# EAGLE board keyboard (EAGLE 7.3.0)

Size 260 x 110 mm. Coordinates in mm from the lower left corner, seen from the top.
Outline: 0,0 260,0 260,110 0,110 0,0
Copper layers (1*16): Top 0.035mm / dielectric 1.5mm / Bottom 0.035mm
Design rules "default": minimum track width 10mil, minimum drill 24mil, track to track 8mil, track to pad 8mil, pad to pad 8mil, via to via 8mil, smd to smd 8mil, copper to edge 40mil, drill to drill 8mil, minimum pad ring 10mil, minimum via ring 8mil, stop-mask expansion 4mil, vias tented up to drill 0mil, thermal gap 10mil
Holes 0.61 mm at 38.66,27.23 133.27,17.38 219.95,27.54 205.66,63.74 129.46,64.06 53.58,63.42 5.95,103.42 86.92,103.11 162.8,103.42 238.36,103.42
Holes 0.51 mm at 4.68,55.16
Holes 0.38 mm at 253.92,63.74
Milling: 4 lines

## Footprints (pad centres in the part's own frame; a part is rotated, then mirrored left to right if it is on the bottom)
TACTILE-SWITCH-SMD = smd 1.524 x 0.762: 1 -2.794,1.905; 2 2.794,1.905; 3 -2.794,-1.905; 4 2.794,-1.905
SOD323-R = smd 0.6 x 0.6: A 1.1,0; C -1.1,0
SO14 = smd 0.66 x 2.032: 1 -3.81,-3.073; 2 -2.54,-3.073; 3 -1.27,-3.073; 4 0,-3.073; 5 1.27,-3.073; 6 2.54,-3.073; 7 3.81,-3.073; 8 3.81,3.073; 9 2.54,3.073; 10 1.27,3.073; 11 0,3.073; 12 -1.27,3.073; 13 -2.54,3.073; 14 -3.81,3.073
SO20W = smd 0.66 x 2.032: 1 -5.715,-5.029; 2 -4.445,-5.029; 3 -3.175,-5.029; 4 -1.905,-5.029; 5 -0.635,-5.029; 6 0.635,-5.029; 7 1.905,-5.029; 8 3.175,-5.029; 9 4.445,-5.029; 10 5.715,-5.029; 11 5.715,5.029; 12 4.445,5.029; 13 3.175,5.029; 14 1.905,5.029; 15 0.635,5.029; 16 -0.635,5.029; 17 -1.905,5.029; 18 -3.175,5.029; 19 -4.445,5.029; 20 -5.715,5.029
1X05 = drill 1.016 long: 1 -5.08,0; 2 -2.54,0; 3 0,0; 4 2.54,0; 5 5.08,0
1X08 = drill 1.016 long: 1 -8.89,0; 2 -6.35,0; 3 -3.81,0; 4 -1.27,0; 5 1.27,0; 6 3.81,0; 7 6.35,0; 8 8.89,0
1X02 = drill 1.016 long: 1 -1.27,0; 2 1.27,0
M0805 = smd 1.3 x 1.6: 1 -0.95,0; 2 0.95,0

## Placement (x,y rotation side)
0  [TACTILE-SWITCH-SMD]  39.61,92.95 0 bottom
1  [TACTILE-SWITCH-SMD]  209.47,92.63 0 bottom
2  [TACTILE-SWITCH-SMD]  190.42,92.63 0 bottom
3  [TACTILE-SWITCH-SMD]  172,92.95 0 bottom
4  [TACTILE-SWITCH-SMD]  152.32,92.63 0 bottom
5  [TACTILE-SWITCH-SMD]  133.91,93.58 0 bottom
6  [TACTILE-SWITCH-SMD]  115.81,92.95 0 bottom
7  [TACTILE-SWITCH-SMD]  96.12,92.63 0 bottom
8  [TACTILE-SWITCH-SMD]  77.39,92.95 0 bottom
9  [TACTILE-SWITCH-SMD]  58.34,92.95 0 bottom
A  [TACTILE-SWITCH-SMD]  195.18,54.85 0 bottom
B  [TACTILE-SWITCH-SMD]  110.41,36.43 0 bottom
BREAK  [TACTILE-SWITCH-SMD]  16.11,92.95 0 bottom
C  [TACTILE-SWITCH-SMD]  147.88,36.43 0 bottom
CAPS  [TACTILE-SWITCH-SMD]  23.41,35.8 0 bottom
CAPS1  [TACTILE-SWITCH-SMD]  236.46,36.11 0 bottom
CAPSLOCK  [TACTILE-SWITCH-SMD]  204.39,35.48 0 bottom
COMMA  [TACTILE-SWITCH-SMD]  29.77,16.11 0 bottom
D  [TACTILE-SWITCH-SMD]  157.08,55.48 0 bottom
D1  [SOD323-R]  68.82,84.38 0 top
D2  [SOD323-R]  74.22,84.69 0 top
D3  [SOD323-R]  79.3,84.69 0 top
D4  [SOD323-R]  84.69,84.69 0 top
D5  [SOD323-R]  90.72,84.69 0 top
D6  [SOD323-R]  97.08,84.69 0 top
D7  [SOD323-R]  103.11,84.69 0 top
D8  [SOD323-R]  109.46,85.01 0 top
D9  [SOD323-R]  115.49,85.01 0 top
D10  [SOD323-R]  121.52,85.01 0 top
D11  [SOD323-R]  68.82,63.74 0 top
D12  [SOD323-R]  74.22,63.74 0 top
D13  [SOD323-R]  80.25,64.06 0 top
D14  [SOD323-R]  85.33,64.37 0 top
D15  [SOD323-R]  91.36,64.37 0 top
D16  [SOD323-R]  97.71,64.69 0 top
D17  [SOD323-R]  104.38,64.69 0 top
D18  [SOD323-R]  110.41,64.69 0 top
D19  [SOD323-R]  115.49,65.01 0 top
D20  [SOD323-R]  121.52,65.01 0 top
D21  [SOD323-R]  69.45,45.96 0 top
D22  [SOD323-R]  74.85,46.27 0 top
D23  [SOD323-R]  80.56,46.27 0 top
D24  [SOD323-R]  85.64,46.27 0 top
D25  [SOD323-R]  91.68,46.59 0 top
D26  [SOD323-R]  98.34,46.91 0 top
D27  [SOD323-R]  104.06,46.91 0 top
D28  [SOD323-R]  110.41,47.55 0 top
D29  [SOD323-R]  116.44,47.23 0 top
D30  [SOD323-R]  122.47,47.23 0 top
D31  [SOD323-R]  69.45,26.27 0 top
D32  [SOD323-R]  75.48,26.59 0 top
D33  [SOD323-R]  81.52,26.91 0 top
DELETE  [TACTILE-SWITCH-SMD]  243.12,73.9 0 bottom
DOWN  [TACTILE-SWITCH-SMD]  48.18,17.06 0 bottom
E  [TACTILE-SWITCH-SMD]  161.84,74.22 0 bottom
EDIT  [TACTILE-SWITCH-SMD]  217.41,55.16 0 bottom
ENTER  [TACTILE-SWITCH-SMD]  11.03,64.06 0 bottom
EXTEND  [TACTILE-SWITCH-SMD]  242.81,54.21 0 bottom
F  [TACTILE-SWITCH-SMD]  138.99,55.48 0 bottom
G  [TACTILE-SWITCH-SMD]  119.3,55.48 0 bottom
GRAPHICS  [TACTILE-SWITCH-SMD]  219.31,73.58 0 bottom
H  [TACTILE-SWITCH-SMD]  100.57,55.16 0 bottom
I  [TACTILE-SWITCH-SMD]  67.55,74.22 0 bottom
IC1  74HC32  [SO14]  95.81,15.48 90 top
IC2  74LS244DW  [SO20W]  149.15,18.02 90 top
INVV  [TACTILE-SWITCH-SMD]  229.47,92.63 0 bottom
J  [TACTILE-SWITCH-SMD]  81.83,54.85 0 bottom
JP1  [1X05]  194.87,102.47 180 top
JP2  [1X08]  43.73,102.47 180 top
JP3  [1X02]  211.06,102.47 0 top
K  [TACTILE-SWITCH-SMD]  62.78,55.16 0 bottom
L  [TACTILE-SWITCH-SMD]  44.05,55.16 0 bottom
LEFT  [TACTILE-SWITCH-SMD]  190.74,17.06 0 bottom
M  [TACTILE-SWITCH-SMD]  72.31,36.43 0 bottom
N  [TACTILE-SWITCH-SMD]  91.68,36.43 0 bottom
O  [TACTILE-SWITCH-SMD]  48.5,73.58 0 bottom
P  [TACTILE-SWITCH-SMD]  30.05,74.25 0 bottom
PERIOD  [TACTILE-SWITCH-SMD]  53.58,35.48 0 bottom
Q  [TACTILE-SWITCH-SMD]  199.94,73.26 0 bottom
QUOTES  [TACTILE-SWITCH-SMD]  209.47,17.38 0 bottom
R  [TACTILE-SWITCH-SMD]  143.11,74.22 0 bottom
R2  10K  [M0805]  90.09,27.54 0 top
R3  10K  [M0805]  97.39,28.18 0 top
RIGHT  [TACTILE-SWITCH-SMD]  172,17.38 0 bottom
S  [TACTILE-SWITCH-SMD]  176.45,55.16 0 bottom
SEMICOLON  [TACTILE-SWITCH-SMD]  229.16,17.38 0 bottom
SPACE  [TACTILE-SWITCH-SMD]  119.62,16.75 0 bottom
SYMB  [TACTILE-SWITCH-SMD]  10.71,17.06 0 bottom
SYMB1  [TACTILE-SWITCH-SMD]  248.21,17.06 0 bottom
T  [TACTILE-SWITCH-SMD]  124.38,74.22 0 bottom
TRUEV  [TACTILE-SWITCH-SMD]  248.52,92.63 0 bottom
U  [TACTILE-SWITCH-SMD]  86.92,74.22 0 bottom
UP  [TACTILE-SWITCH-SMD]  67.87,17.06 0 bottom
V  [TACTILE-SWITCH-SMD]  129.14,36.43 0 bottom
W  [TACTILE-SWITCH-SMD]  180.9,74.22 0 bottom
X  [TACTILE-SWITCH-SMD]  167.24,36.43 0 bottom
Y  [TACTILE-SWITCH-SMD]  105.97,74.22 0 bottom
Z  [TACTILE-SWITCH-SMD]  185.97,36.11 0 bottom

## Library data of the parts
0 1-9 A B BREAK C CAPS CAPS1 CAPSLOCK COMMA D DELETE DOWN E EDIT ENTER EXTEND F G GRAPHICS H I INVV J K L LEFT M N O P PERIOD Q QUOTES R RIGHT S SEMICOLON SPACE SYMB SYMB1 T TRUEV U UP V W X Y Z = SparkFun-Electromechanical; PROD_ID: SWCH-08247
D1-D33 = diode
IC1 IC2 = 74xx-us
JP1-JP3 = pinhead
R2 R3 = rcl

## Nets
A8: D3.C IC1.2 JP2.6 V.3
A9: G.3 JP2.3
A10: JP2.2 T.3
A11: 5.3 IC2.1 JP2.1
A12: 0.3 D1.C IC2.19 JP2.4
A13: IC1.10 IC1.13 JP2.5 P.3
A14: ENTER.3 JP2.7
A15: COMMA.3 D2.C IC1.5 JP2.8 SPACE.3
CAPSLOCK: CAPSLOCK.3 D17.C IC2.2
D0: 1.1 D14.A D33.A EDIT.3 JP1.1
D1: 2.1 D7.A D16.A D26.A D32.A JP1.2
D2: 3.1 D8.A D18.A JP1.3
D3: 4.1 D10.A D29.A JP1.4
D4: 5.1 D13.A D30.A JP1.5
DOWN: D22.C DOWN.3 IC2.17
EXTEND: D15.C D27.C EXTEND.3
GND: CAPSLOCK.2 DOWN.2 EXTEND.2 GRAPHICS.2 IC1.7 IC2.10 INVV.2 JP3.2 LEFT.2 QUOTES.2 RIGHT.2 SEMICOLON.2 TRUEV.2 UP.2
GRAPHICS: D25.C GRAPHICS.3 IC2.11
INVV: D20.C IC2.6 INVV.3
LEFT: D21.C IC2.8 LEFT.3
N$1: D4.A EDIT.2
N$2: D5.A EDIT.1
N$3: BREAK.3 D2.A
N$4: BREAK.4 D3.A
N$5: D1.A DELETE.3
N$6: 1.2 Q.1
N$7: A.1 Q.2
N$8: A.2 CAPS1.1 CAPS.1
N$9: BREAK.2 CAPS.2 SPACE.2
N$10: B.1 H.2
N$11: H.1 Y.2
N$12: 6.2 Y.1
N$13: 2.2 W.1
N$14: S.1 W.2
N$15: S.2 Z.1
N$16: SYMB1.1 SYMB.2 Z.2
N$17: D9.A M.2 X.2
N$18: C.2 D6.A N.2
N$19: B.2 V.2
N$20: 3.2 E.1
N$21: D.1 E.2
N$22: D.2 X.1
N$23: 4.2 R.1
N$24: F.1 R.2
N$25: C.1 F.2
N$26: 5.2 T.1
N$27: G.1 T.2
N$28: G.2 V.1
N$29: 3.3 4.4
N$30: 4.3 5.4
N$31: 2.3 3.4
N$32: 1.3 2.4 D4.C
N$33: C.3 V.4
N$34: R.3 T.4
N$35: E.3 R.4
N$36: E.4 W.3
N$37: Q.3 W.4
N$38: F.3 G.4
N$39: D.3 F.4
N$40: D.4 S.3
N$41: A.3 S.4
N$42: 0.4 9.3
N$43: J.2 N.1
N$44: J.1 U.2
N$45: 7.2 U.1
N$46: K.2 M.1
N$47: I.2 K.1
N$48: 8.2 I.1
N$49: L.2 SYMB.1
N$50: L.1 O.2
N$51: 9.2 O.1
N$52: ENTER.2 SPACE.1
N$53: ENTER.1 P.2
N$54: 0.2 DELETE.2 P.1
N$55: 8.3 9.4
N$56: 7.3 8.4
N$57: 6.3 7.4
N$58: C.4 X.3
N$59: X.4 Z.3
N$60: CAPS1.3 CAPS.3 D5.C Z.4
N$61: O.3 P.4
N$62: I.3 O.4
N$63: I.4 U.3
N$64: U.4 Y.3
N$65: ENTER.4 L.3
N$66: K.3 L.4
N$67: J.3 K.4
N$68: H.3 J.4
N$69: SPACE.4 SYMB1.3 SYMB.3
N$70: D11.A D12.A M.3 SYMB.4
N$71: M.4 N.3
N$72: B.3 N.4
N$73: DELETE.4
N$74: D7.C IC2.18
N$75: D8.C IC2.16
N$76: COMMA.4 PERIOD.3
N$77: D10.C IC2.14
N$78: COMMA.2 D11.C
N$79: D12.C PERIOD.2
N$80: D13.C IC2.12
N$81: D16.C IC2.9
N$82: D6.C PERIOD.1 R2.2
N$83: COMMA.1 D9.C R3.2
N$84: D14.C IC1.3
N$85: D18.C IC2.7
N$86: D26.C IC1.6
N$87: D27.A D28.A D31.A IC1.4
N$88: D29.C IC2.5
N$89: D30.C IC2.3
N$90: D15.A D17.A D19.A D20.A D21.A D22.A D23.A D24.A D25.A IC1.1
N$108: D32.C IC1.8
N$114: D33.C IC1.11
QUOTES: D31.C IC1.12 QUOTES.3
RIGHT: D24.C IC2.13 RIGHT.3
SEMICOLON: D28.C IC1.9 SEMICOLON.3
TRUEV: D19.C IC2.4 TRUEV.3
UP: D23.C IC2.15 UP.3
VCC: IC1.14 IC2.20 JP3.1 R2.1 R3.1

## Tracks (layer width: path | path; a pad name or v marks a point on that pad's centre or on a via)
A8  (3 unrouted)
A9  (1 unrouted)
A10  (1 unrouted)
A11  (2 unrouted)
A12  (3 unrouted)
A13  (3 unrouted)
A14  (1 unrouted)
A15  (4 unrouted)
CAPSLOCK  (2 unrouted)
D0  (4 unrouted)
D1  (5 unrouted)
D2  (3 unrouted)
D3  (3 unrouted)
D4  (3 unrouted)
DOWN  (2 unrouted)
EXTEND  (2 unrouted)
GND  (13 unrouted)
GRAPHICS  (2 unrouted)
INVV  (2 unrouted)
LEFT  (2 unrouted)
N$1  (1 unrouted)
N$2  (1 unrouted)
N$3  (1 unrouted)
N$4  (1 unrouted)
N$5  (1 unrouted)
N$6  (1 unrouted)
N$7  (1 unrouted)
N$8  (2 unrouted)
N$9  (2 unrouted)
N$10  (1 unrouted)
N$11  (1 unrouted)
N$12  (1 unrouted)
N$13  (1 unrouted)
N$14  (1 unrouted)
N$15  (1 unrouted)
N$16  (2 unrouted)
N$17  (2 unrouted)
N$18  (2 unrouted)
N$19  (1 unrouted)
N$20  (1 unrouted)
N$21  (1 unrouted)
N$22  (1 unrouted)
N$23  (1 unrouted)
N$24  (1 unrouted)
N$25  (1 unrouted)
N$26  (1 unrouted)
N$27  (1 unrouted)
N$28  (1 unrouted)
N$29  (1 unrouted)
N$30  (1 unrouted)
N$31  (1 unrouted)
N$32  (2 unrouted)
N$33  (1 unrouted)
N$34  (1 unrouted)
N$35  (1 unrouted)
N$36  (1 unrouted)
N$37  (1 unrouted)
N$38  (1 unrouted)
N$39  (1 unrouted)
N$40  (1 unrouted)
N$41  (1 unrouted)
N$42  (1 unrouted)
N$43  (1 unrouted)
N$44  (1 unrouted)
N$45  (1 unrouted)
N$46  (1 unrouted)
N$47  (1 unrouted)
N$48  (1 unrouted)
N$49  (1 unrouted)
N$50  (1 unrouted)
N$51  (1 unrouted)
N$52  (1 unrouted)
N$53  (1 unrouted)
N$54  (2 unrouted)
N$55  (1 unrouted)
N$56  (1 unrouted)
N$57  (1 unrouted)
N$58  (1 unrouted)
N$59  (1 unrouted)
N$60  (3 unrouted)
N$61  (1 unrouted)
N$62  (1 unrouted)
N$63  (1 unrouted)
N$64  (1 unrouted)
N$65  (1 unrouted)
N$66  (1 unrouted)
N$67  (1 unrouted)
N$68  (1 unrouted)
N$69  (2 unrouted)
N$70  (3 unrouted)
N$71  (1 unrouted)
N$72  (1 unrouted)
N$74  (1 unrouted)
N$75  (1 unrouted)
N$76  (1 unrouted)
N$77  (1 unrouted)
N$78  (1 unrouted)
N$79  (1 unrouted)
N$80  (1 unrouted)
N$81  (1 unrouted)
N$82  (2 unrouted)
N$83  (2 unrouted)
N$84  (1 unrouted)
N$85  (1 unrouted)
N$86  (1 unrouted)
N$87  (3 unrouted)
N$88  (1 unrouted)
N$89  (1 unrouted)
N$90  (9 unrouted)
N$108  (1 unrouted)
N$114  (1 unrouted)
QUOTES  (2 unrouted)
RIGHT  (2 unrouted)
SEMICOLON  (2 unrouted)
TRUEV  (2 unrouted)
UP  (2 unrouted)
VCC  (4 unrouted)